# Altium PCB TU_ADV_PCB.PcbDoc
Units mm, origin at the board's own origin, x right, y up, seen from the top; angles counter-clockwise.
Board outline 90.1 x 40 mm, 2 copper layers (Top Layer, Bottom Layer); 28 components, 21 nets, 79 pads, 17 vias.
Unrouted connection lines stored in the file: 14.
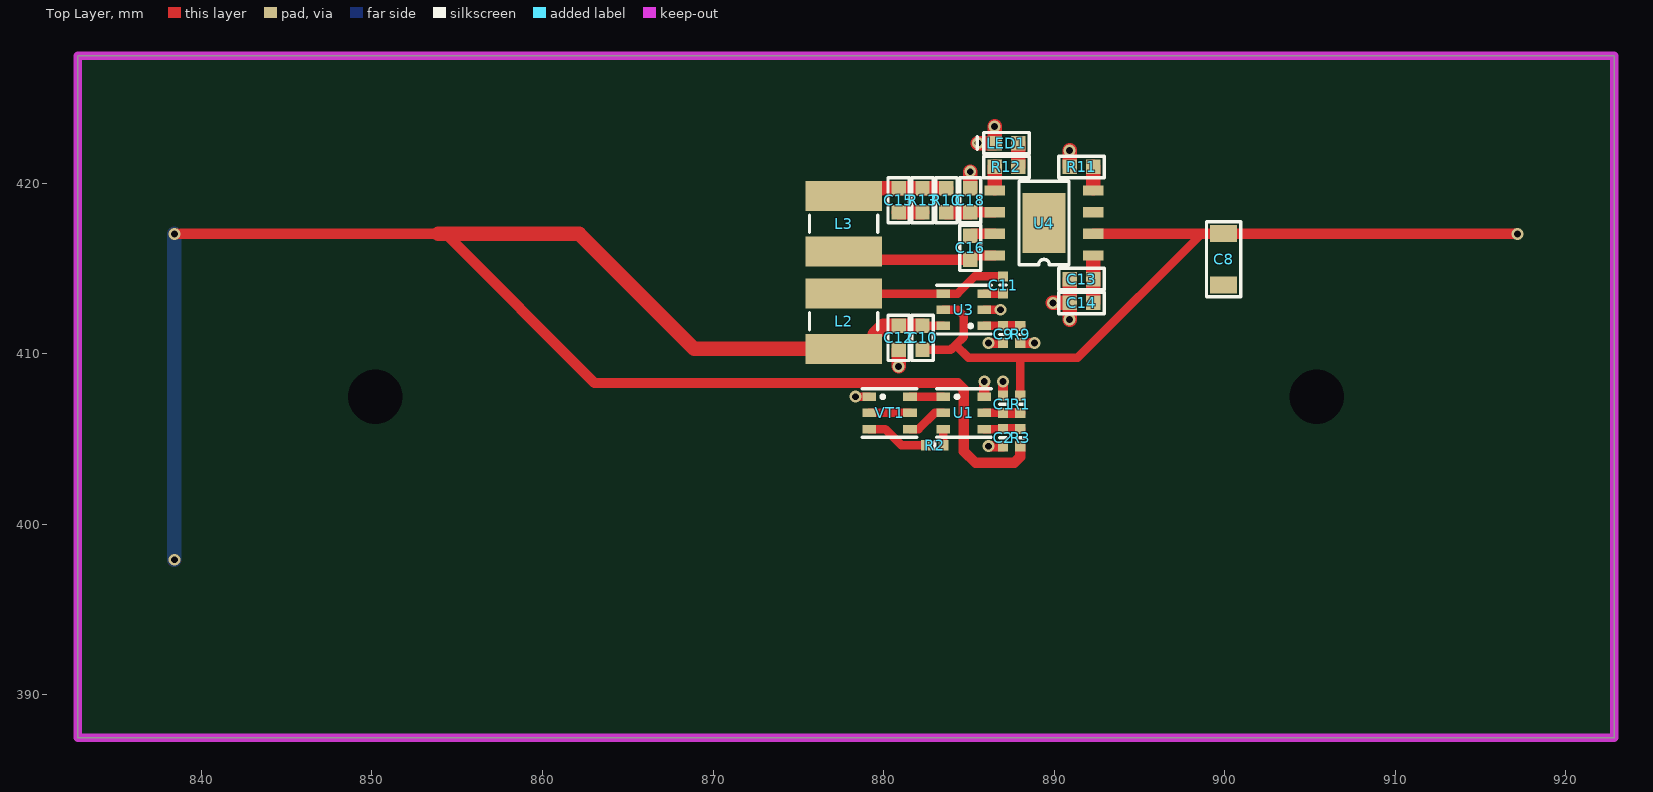
[diagram p0: Top Layer view]
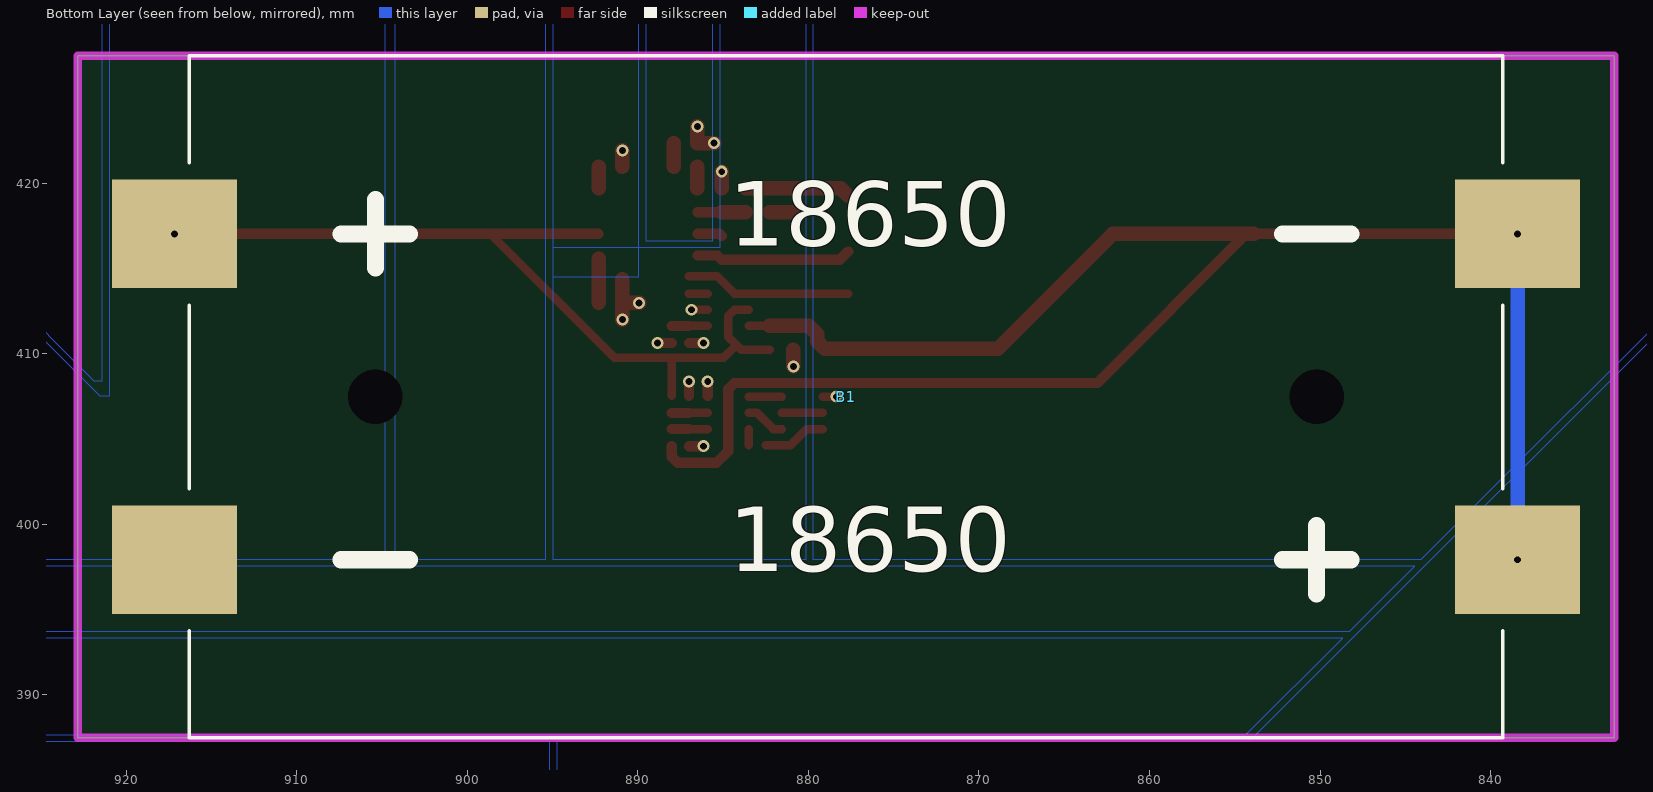
[diagram p1: Bottom Layer view, seen from below]
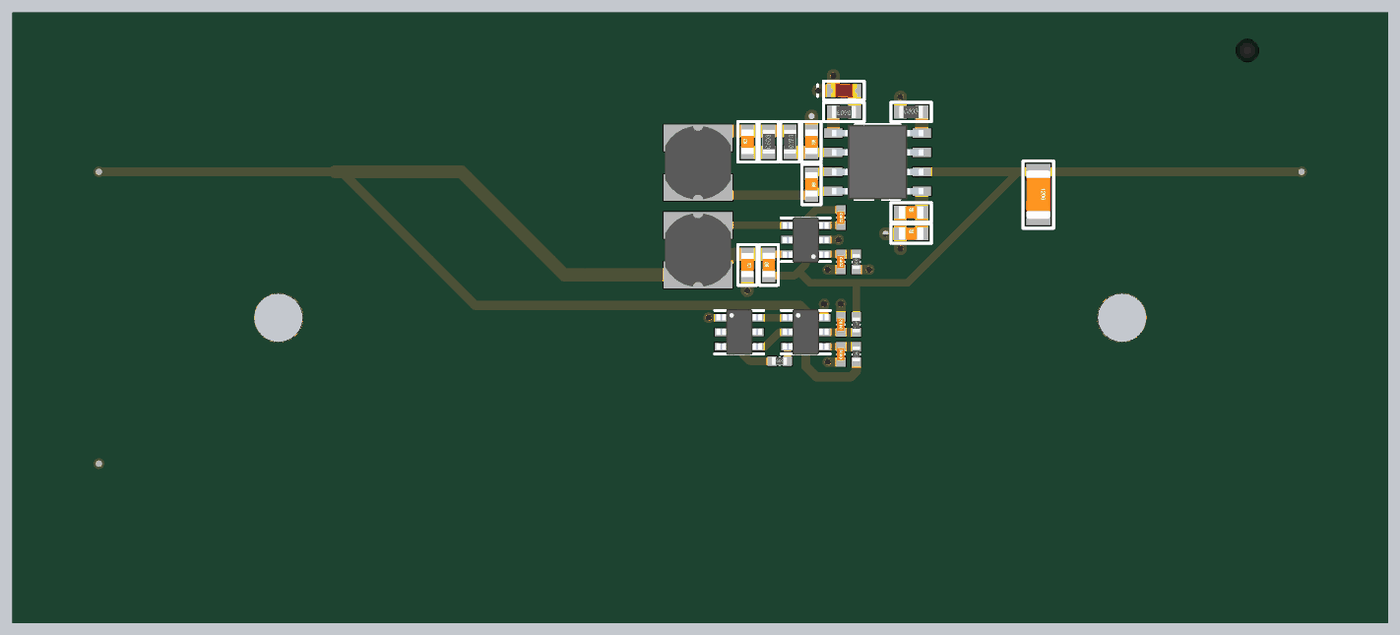
[diagram p2: 3D render of the assembled board from above, using the file's embedded part models]

## Layer stack, top to bottom
Top Solder: solder mask 0.0102, Solder Resist, Dk 3.5
Top Layer: signal copper 0.0356
Dielectric 1: dielectric 0.32, FR-4, Dk 4.8
Bottom Layer: signal copper 0.0356
Bottom Solder: solder mask 0.0102, Solder Resist, Dk 3.5

## Board outline
832.747,387.478 832.747,427.478 922.847,427.478 922.847,387.478

## Design rules (kind name [scope] priority, off if disabled: settings)
BoardOutlineClearance [All] p1: gap=0.3 ignorepadtopadclearanceinfootprint=FALSE
Clearance Clearance_MultiLayerPad [OnLayer('Multi-Layer') and IsPad] p1: gap=0.2 ignorepadtopadclearanceinfootprint=FALSE except(0: Arc-Hole Track-Hole SMDPad-Hole Via-Hole Text-Hole; 0.3: Arc-Poly Arc-Region Track-Poly Track-Region SMDPad-Poly SMDPad-Region Via-Poly Via-Region Fill-Poly Poly-Poly Poly-Region Poly-Text Poly-Hole Region-Region Region-Text Region-Hole; 0.4: Arc-THPad SMDPad-THPad THPad-THPad THPad-Via THPad-Poly THPad-Region THPad-Text THPad-Hole)
Clearance Clearance_Polygon [InPolygon] p2: gap=0.3 ignorepadtopadclearanceinfootprint=FALSE except(0: Arc-Hole Track-Hole SMDPad-Hole Via-Hole Text-Hole; 0.1: Arc-Arc Arc-Track Arc-SMDPad Arc-Via Arc-Text Track-Track Track-SMDPad Track-Via Track-Text SMDPad-SMDPad SMDPad-Via SMDPad-Text Via-Via Via-Text Text-Text; 0.2: Arc-Fill Track-THPad Track-Fill SMDPad-Fill THPad-Fill Via-Fill Fill-Fill Fill-Region Fill-Text Fill-Hole; 0.4: Arc-THPad SMDPad-THPad THPad-THPad THPad-Via THPad-Poly THPad-Region THPad-Text THPad-Hole)
Clearance [All] p3: gap=0.3 ignorepadtopadclearanceinfootprint=FALSE except(0: Arc-Hole Track-Hole SMDPad-Hole Via-Hole Text-Hole; 0.1: Arc-Arc Arc-Track Arc-SMDPad Arc-Via Arc-Text Track-Track Track-SMDPad Track-Via Track-Text SMDPad-SMDPad SMDPad-Via SMDPad-Text Via-Via Via-Text Text-Text; 0.2: Arc-Fill Track-THPad Track-Fill SMDPad-Fill THPad-Fill Via-Fill Fill-Fill Fill-Region Fill-Text Fill-Hole; 0.4: Arc-THPad SMDPad-THPad THPad-THPad THPad-Via THPad-Poly THPad-Region THPad-Text THPad-Hole)
ComponentClearance [All] p1: gap=0.3 collisioncheckmode=3 verticalgap=0.3 showdistances=FALSE
DiffPairsRouting [All] p1: maxlimit=0.3 minlimit=0.1 mostfreqgap=0.15 toplayer_minwidth=0.1 toplayer_maxwidth=0.3 toplayer_prefwidth=0.15 bottomlayer_minwidth=0.1 bottomlayer_maxwidth=0.3 bottomlayer_prefwidth=0.15 maxuncoupledlength=12.7
Height [All] p1: minheight=0 maxheight=50 prefheight=12.7
HoleSize [All] p1: absolutevalues=TRUE maxlimit=10 minlimit=0.3 maxpercent=80.000 minpercent=20.000
HoleToHoleClearance [All] p1: gap=0.3 allowstackedmicrovias=TRUE
MinimumSolderMaskSliver [All] p1: minsoldermaskwidth=0.2
PlaneClearance [All] p1: clearance=0.5
PlaneConnect [All] p1: planeconnectstyle=Relief reliefexpansion=0.5 reliefentries=4 reliefconductorwidth=0.2 reliefairgap=0.2
PolygonConnect PolygonConnect_PadGND [InNet('GND') and IsPad] p1: connectstyle=Relief reliefconductorwidth=0.2 reliefentries=4 polygonreliefangle="90 Angle" airgapwidth=0.2
PolygonConnect PolygonConnect_Via [IsVia] p2: connectstyle=Direct reliefconductorwidth=0.254 reliefentries=4 polygonreliefangle="90 Angle" airgapwidth=0.254
PolygonConnect [All] p3: connectstyle=Relief reliefconductorwidth=0.2 reliefentries=4 polygonreliefangle="90 Angle" airgapwidth=0.2
RoutingVias [All] p1: holewidth=0.2 width=0.4 viastyle="Through Hole" minholewidth=0.2 minwidth=0.4 maxholewidth=0.5 maxwidth=1.2
SilkToSolderMaskClearance [IsPad] p1: minsilkscreentomaskgap=0.2 clearancetoexposedcopper=TRUE
SolderMaskExpansion [All] p1: expansion=0.075 istentingtop=FALSE
Width [All] p1: maxlimit=10 minlimit=0.1 preferedwidth=0.1
21 further rules are at their usual default settings.

## Classes and differential pairs
component class U_2S_BATTERY_PROTECTION_SCH: C1 C2 R1 R2 R3 U1 VT1
component class U_2S_BATTERY_BALANCER_SCH: C8 C9 C10 C11 C12 L2 R9 U3
component class FLASHLIGHT_MAIN_SCH: B1
component class U_2S_BATTERY_CHARGER_SCH: C13 C14 C15 C16 C18 L3 LED1 R10 R11 R12 R13 U4

## Components (designator, comment, footprint, x,y, rotation, side; value= is the part's Value field where it differs from the comment)
B1 "2x18650_holder" 2x18650_holder 877.797,407.478 r180 bottom
C1 "Cap_0402" "CAP: 0402" 887.008,407.033 r90 top value=0.1μF
C2 "Cap_0402" "CAP: 0402" 887.008,405.083 r90 top value=0.1μF
C8 "Cap_1206" "CAP: 1206" 899.938,415.543 r270 top value=22μF
C9 "Cap_0402" "CAP: 0402" 887.008,411.133 r270 top value=1nF
C10 "Cap_0603" "CAP: 0603" 882.283,410.933 r90 top value=10μF
C11 "Cap_0402" "CAP: 0402" 887.008,414.033 r270 top value=10nF
C12 "Cap_0603" "CAP: 0603" 880.883,410.933 r270 top value=10μF
C13 "Cap_0603" "CAP: 0603" 891.608,414.383 r0 top value=22μF
C14 "Cap_0603" "CAP: 0603" 891.608,412.983 r0 top value=22μF
C15 "Cap_0603" "CAP: 0603" 880.883,419.003 r90 top value=10μF
C16 "Cap_0603" "CAP: 0603" 885.083,416.208 r270 top value=0.1μF
C18 "Cap_0603" "CAP: 0603" 885.083,419.003 r270 top value=10μF
L2 "CD43" CD43 877.658,411.908 r180 top value=1μH
L3 "CD43" CD43 877.658,417.628 r0 top value=2.2μH
LED1 "LED_0603" LED_0603 887.208,422.353 r0 top
R1 "" "RES: 0402" 888.008,407.033 r90 top value=330R
R2 "" "RES: 0402" 883.008,404.633 r0 top value=2K
R3 "" "RES: 0402" 888.008,405.083 r270 top value=330R
R9 "" "RES: 0402" 888.008,411.133 r270 top value=200K
R10 "Resistor_0603" "RES: 0603" 883.683,419.003 r270 top value=0.5R
R11 "Resistor_0603" "RES: 0603" 891.608,420.953 r0 top value=51K
R12 "Resistor_0603" "RES: 0603" 887.208,420.953 r180 top value=100R
R13 "Resistor_0603" "RES: 0603" 882.283,419.003 r90 top value=51K
U1 "HY2120" SOT-23-6 884.708,406.533 r0 top
U3 "ETA3000" SOT-23-6 884.708,412.583 r180 top
U4 "IP2325" ESOP-8 889.408,417.668 r180 top
VT1 "8205A" SOT-23-6 880.351,406.533 r0 top

## Footprints (in the part's own frame and the unit in brackets; to place one, negate y for a bottom-side part, rotate by r counter-clockwise, add the part's x,y. Pads: shape width x height; smd on the part's side, far side on the other; paste and mask are expansions set on the pad)
2x18650_holder [mm] "2x18650_holder"
  rect 7.35x6.35 smd: 1(-39.375,9.555) 2(-39.375,-9.555) 3(39.375,-9.555) 4(39.375,9.555)
  rect 0x0 hole 3.2: ""(-27.6,0) ""(27.6,0)
  silkscreen extent -38.5,-20 38.5,20, body extent -43,-19.89 43,19.89, height 14.87
"CAP: 0402" [mm]
  rect 0.6x0.6 smd: 1(-0.5,0) 2(0.5,0)
  silkscreen extent 0,-0.2 0,0.2, body extent -0.53,-0.25 0.51,0.25, height 0.51
"CAP: 0603" [mm]
  rect 0.85x0.85 smd: 1(-0.7,0) 2(0.7,0)
  silkscreen extent -1.33,-0.63 1.33,0.63, body extent -0.8,-0.4 0.8,0.4, height 0.3
"CAP: 1206" [mm]
  rect 1x1.6 smd: 1(-1.5,0) 2(1.5,0)
  silkscreen extent -2.2,-1 2.2,1, body extent -1.6,-0.8 1.6,0.8, height 1
CD43 [mm] "CD43"
  rect 4.5x1.75 smd: 1(0,1.625) 2(0,-1.625)
  silkscreen extent -2,-0.5 2,0.5, body extent -2.15,-2.4 2.15,2.4, height 3.51
ESOP-8 [mm] "ESOP-8"
  rect 1.2x0.6 smd: 1(-2.9,1.905) 2(-2.9,0.635) 3(-2.9,-0.635) 4(-2.9,-1.905) 5(2.9,-1.905) 6(2.9,-0.635) 7(2.9,0.635) 8(2.9,1.905)
  rect 2.5x3.5 smd: 9(0,0)
  silkscreen extent -1.47,-2.45 1.47,2.45, body extent -3,-2.45 3,2.45, height 1.76
LED_0603 [mm] "LED_0603"
  rect 0.85x0.85 smd: 1(-0.7,0) 2(0.7,0)
  silkscreen extent -1.72,-0.63 1.33,0.63, body extent -0.85,-0.45 0.85,0.45, height 0.91
"RES: 0402" [mm]
  rect 0.6x0.6 smd: 1(-0.5,0) 2(0.5,0)
  silkscreen extent 0,-0.2 0,0.2, body extent -0.52,-0.25 0.47,0.25, height 0.34
"RES: 0603" [mm]
  rect 0.85x0.85 smd: 1(-0.7,0) 2(0.7,0)
  silkscreen extent -1.33,-0.63 1.33,0.63, body extent -0.8,-0.4 0.8,0.4, height 0.44
SOT-23-6 [mm]
  rect 0.8x0.5 smd: 1(-1.2,0.95) 2(-1.2,0) 3(-1.2,-0.95) 4(1.2,-0.95) 5(1.2,0) 6(1.2,0.95)
  silkscreen extent -1.6,-1.43 1.6,1.43, body extent -1.5,-1.5 1.5,1.5, height 1.11

## Part data
B1: "18650 battery holder", Datasheet=https://aliexpress.ru/item/32370231319.html?spm=a2g2w.favourites.mywishlist.8.12044aa670bhdZ&sku_id=57294681151, HelpURL=https://aliexpress.ru/item/32370231319.html?spm=a2g2w.favourites.mywishlist.8.12044aa670bhdZ&sku_id=57294681151, Product Category="Battery holders"
C1 C2 C9 C11: Package/Case=0402, Temperature=-55...+125°C(-55...+85°C), TypeDielectric=X7R(X5R), Voltage=??V, Product Category=Capacitors
C8: Package/Case=1206, Temperature=-55...+125°C(-55...+85°C), TypeDielectric=X7R(X5R), Voltage=??V, Product Category=Capacitors
C10 C12 C13 C14 C15 C16 C18: Package/Case=0603, Temperature=-55...+125°C(-55...+85°C), TypeDielectric=X7R(X5R), Voltage=25V, Product Category=Capacitors
L2 L3: "SMD Power Inductor", Manufacturer=SUMIDA, Datasheet=https://products.sumida.com/products/pdf/CD43.pdf, HelpURL=https://aliexpress.ru/item/1005002090028747.html?sku_id=12000018707218161&spm=a2g2w.productlist.search_results.13.550c3fc1XziZsU, Product Category=Inductors
R1 R2 R3 R9: library part Resistor_0402, Package/Case=0402, Temperature=-55...+125°C, Tolerance=±5%, Product Category=Resistors
R10 R11 R12 R13: Package/Case=0603, Temperature=-55...+125°C, Tolerance=±5%, Product Category=Resistors
U1: "2-cell lithium-ion/lithium polymer rechargeable battery / protection", Manufacturer=HYCON, Package/Case=SOT-23-6, Datasheet=https://static.chipdip.ru/lib/671/DOC012671868.pdf, HelpURL=https://aliexpress.ru/item/32858079670.html?sku_id=65323825149&spm=a2g2w.productlist.search_results.5.6e4d5adf5VsdVe, Product Category="Battery protection"
U3: "Inductive cell balancer", Manufacturer=ETA, Package/Case=SOT-23-6, Datasheet=https://datasheetspdf.com/mobile/1424958/ETA/ETA3000/1, HelpURL=https://aliexpress.ru/item/1005002742533593.html?sku_id=12000021935942334, Product Category="Battery balancers"
U4: "2s charge Module", Manufacturer=INJOINIC, Package/Case=ESOP-8, Datasheet=http://www.injoinic.com/wwwroot/uploads/files/20230913/d8e5944686d69fa501fe83e437133f8d.pdf, HelpURL=https://aliexpress.ru/item/1005005892683023.html?sku_id=12000034732384666, Product Category="Charge modules"
VT1: "MOSFET N-CHANNEL 20V 5A", Manufacturer=UMW, Package/Case=SOT-23-6, Datasheet=https://static.chipdip.ru/lib/303/DOC021303523.pdf, HelpURL=https://www.chipdip.by/product/8205a, Product Category=MOSFET
LED1: Product Category="LED Bars and Arrays"

## Via types
v1: diameter 0.7/0.7 (per signal layer), hole 0.4, Top Layer to Bottom Layer, tented both sides, 17 vias

## Nets (pads, with @x,y where several pads share a name; then routed paths per layer and width w, separated by ;. In a path a pad name is that pad's centre, name@x,y a point inside that pad or via, vN(x,y) a via of type N, cw(c..) or ccw(c..) an arc to the next point about the centre after c; other vN are vias at no path point)
+5V: C15.2 L3.1 R10.1 R13.2 | length 6.2
  Top Layer w0.85: L3.1 878.108,419.703 C15.2 R13.2 R10.1
BAT+: B1.1 C8.1 C10.1 R1.2 U3.5 U4.2 | length 50.1
  Top Layer w0.5: C10.1 883.693,410.233 883.942,410.233 884.225,410.517 ; U3.5 884.339,412.583 884.708,412.215 884.708,410.999 884.225,410.517 ; R1.2 888.008,409.764 ; 898.644,417.033 891.375,409.764 888.008,409.764 ; 884.225,410.517 884.978,409.764 888.008,409.764
  Top Layer w0.6: U4.2 898.644,417.033 904.282,417.033 v1(917.172,417.033)
BAT-: R2.1 VT1.3 | length 3.8
  Top Layer w0.5: VT1.3 880.101,405.583 881.051,404.633 R2.1
BATM: B1.3 B1.4 C10.2 C12.1 L2.1 R3.2 U3.6 | length 109.9
  Top Layer w0.5: C10.2 U3.6
  Top Layer w0.6: v1(838.422,417.033) 853.899,417.033 ; 854.318,417.033 863.068,408.283 884.356,408.283 884.708,407.932 884.708,404.291 885.387,403.611 887.656,403.611 888.008,403.963 R3.2
  Top Layer w0.85: 853.899,417.033 854.318,417.033 862.144,417.033 868.894,410.283 L2.1 879.033,410.283 879.483,410.733 879.483,411.135 879.981,411.633 C12.1 C10.2
  Bottom Layer w0.85: v1(838.422,397.923) v1(838.422,417.033)
GND: B1.2 C1.2 C2.1 C8.2 C9.2 C12.2 C13.1 C14.1 C15.1 C18.1 LED1.1 R9.2 R11.1 R13.1 U1.6 U3.2 U4.9 VT1.1 | length 15.6
  Top Layer w0.5: v1(878.351,407.483) VT1.1 ; U3.2 v1(886.858,412.583)
  Top Layer w0.6: U1.6@885.908,407.542 v1(885.908,408.383) ; v1(886.158,404.583) C2.1 ; v1(886.158,410.633) C9.2 ; C1.2 v1(887.008,408.383) ; R9.2 v1(888.858,410.633)
  Top Layer w0.85: v1(880.883,409.258) C12.2 ; C15.1 R13.1 ; C18.1 v1(885.083,420.678) ; v1(885.533,422.353) LED1.1 v1(886.508,423.328) ; v1(889.933,412.983) C14.1 ; v1(890.908,412.008) C14.1 ; C13.1 C14.1 ; R11.1 v1(890.908,421.928)
NetC1_1: C1.1 R1.1 U1.5 | length 2.1
  Top Layer w0.5: U1.5 C1.1
  Top Layer w0.6: C1.1 R1.1
NetC2_2: C2.2 R3.1 U1.4 | length 2.1
  Top Layer w0.5: U1.4 C2.2
  Top Layer w0.6: C2.2 R3.1
NetC9_1: C9.1 R9.1 U3.1 | length 2.1
  Top Layer w0.5: U3.1 C9.1
  Top Layer w0.6: C9.1 R9.1
NetC11_1: C11.1 L2.2 U3.4 | length 9.8
  Top Layer w0.5: L2.2 U3.4 884.339,413.533 885.339,414.533 C11.1
NetC11_2: C11.2 U3.3 | length 1.1
  Top Layer w0.5: U3.3 C11.2
NetC13_2: C13.2 C14.2 U4.1 | length 2.6
  Top Layer w0.85: C14.2 C13.2 U4.1@892.308,415.579
NetC16_1: C16.1 U4.7 | length 1.5
  Top Layer w0.6: C16.1 885.208,417.033 U4.7
NetC16_2: C16.2 L3.2 U4.8 | length 9.2
  Top Layer w0.6: L3.2 878.153,415.508 C16.2 885.338,415.763 U4.8
NetC18_2: C18.2 R10.2 U4.6 | length 2.8
  Top Layer w0.6: C18.2 U4.6
  Top Layer w0.856: R10.2 C18.2
NetLED1_2: LED1.2 R12.1 | length 1.4
  Top Layer w0.85: R12.1 LED1.2
NetR2_2: R2.2 U1.3 | length 0.9
  Top Layer w0.5: R2.2 U1.3
NetR11_2: R11.2 U4.4 | length 1.2
  Top Layer w0.85: U4.4@892.308,419.717 R11.2
NetR12_2: R12.2 U4.5 | length 1.2
  Top Layer w0.85: U4.5@886.508,419.717 R12.2
NetU1_1: U1.1 VT1.6 | length 2
  Top Layer w0.5: VT1.6 U1.1
NetU1_2: U1.2 VT1.4 | length 2.4
  Top Layer w0.5: VT1.4 882.054,405.583 883.004,406.533 U1.2
NetVT1_2: VT1.2 VT1.5 | length 2.4
  Top Layer w0.5: VT1.2 VT1.5
pads on no net: B1. U4.3

## Polygon pours and split planes (outlines as drawn)
no net on Bottom Layer "1" (solid, shelved, pour order 63): 921.403,476.99 921.898,476.99 933.041,465.847 933.041,426.813 941.853,426.813 941.853,422.971 932.641,422.971 932.641,419.169 921.898,408.426 921.403,408.426
no net on Bottom Layer "1" (solid, shelved, pour order 73): 889.944,498.675 930.88,498.675 954.726,474.829 954.726,448.498 960.156,448.498 960.156,443.438 954.726,443.438 949.666,443.438 949.666,472.733 928.784,493.615 895.003,493.615 895.003,414.506 889.943,414.506
no net on Bottom Layer "NONET_L02_P061" (solid, shelved, pour order 61): 941.853,426.813 939.48,426.813 939.48,418.439 941.853,418.439
GND on Bottom Layer "1" (solid, shelved, pour order 30): 949.266,472.567 949.266,443.038 958.703,443.038 958.703,397.94 928.678,397.94 928.678,403.169 942.253,416.744 942.253,427.213 933.441,427.213 933.441,466.012 922.064,477.39 921.003,477.39 921.003,407.5 921.538,407.5 933.041,419.004 933.041,422.571 939.08,422.571 939.08,418.058 925.505,404.483 925.505,397.94 921.006,397.94 916.776,397.94 904.234,397.94 904.236,493.215 928.619,493.215
GND on Bottom Layer "1" (solid, shelved, pour order 81): 807.75,456.593 824.079,472.921 802.195,494.805 802.195,504.135 805.257,504.135 830.275,479.117 855.293,504.135 885.936,504.135 885.936,499.075 879.739,499.075 879.738,397.94 844.052,397.94 808.647,433.344 807.75,433.344
no net on Bottom Layer "1" (solid, shelved, pour order 79): 880.139,498.675 885.199,498.675 885.199,416.218 895.003,416.218 895.003,397.94 880.138,397.94
no net on Bottom Layer "Bottom Layer-E.GND" (solid, shelved, pour order 77): 808.75,431.174 810.251,431.174 823.817,417.608 854.177,387.249 894.756,387.249 894.756,380.262 891.609,380.262 891.609,361.706 852.585,361.706 808.75,405.541
GND on Bottom Layer "1" (solid, shelved, pour order 67): 885.599,504.135 933.142,504.135 960.186,477.091 960.186,455.774 955.126,455.774 955.126,474.994 931.046,499.075 889.543,499.075 889.543,416.618 885.599,416.618
GND on Bottom Layer "1" (solid, shelved, pour order 65): 895.403,493.215 904.856,493.215 904.856,397.94 895.403,397.94
no net on Bottom Layer "1" (solid, shelved, pour order 69): 930.486,397.54 930.486,393.726 848.265,393.726 844.452,397.54
GND on Bottom Layer "1" (solid, shelved, pour order 71): 848.665,393.326 930.886,393.326 930.886,398.29 958.703,398.29 958.703,387.648 854.343,387.648
no net on Bottom Layer "Bottom Layer-E.GND" (solid, shelved, pour order 75): 895.156,387.249 932.289,387.249 932.289,361.706 892.009,361.706 892.009,379.862 895.156,379.862
no net on Top Layer "Top Layer-+3V3" (solid, shelved, pour order 103): 955.861,402.525 960.181,402.525 960.181,390.039 962.181,392.039 962.181,410.689 942.581,410.689 942.581,407 955.862,407

## Keep-outs
Keep-Out Layer:
  the board outline again, w0.5

## Silkscreen, mask and mechanical layers (free items; w line width, h text height)
Mechanical 3:
  lines w0.05: 883.508,406.533 885.908,406.533 ; 884.852,408.383 887.008,408.383 ; 885.908,407.483 885.908,408.684
Mechanical 15:
  lines w0.05: 874.37,410.491 882.74,410.491 ; 877.658,394.458 877.658,416.003 ; 879.908,420.128 880.458,420.128 ; 880.458,418.728 880.458,419.278

## Text inside footprints (layer, text, board x,y; h text height)
B1: Bottom Overlay "18650" at 884.687,415.084 h6.5; Bottom Overlay "18650" at 884.687,395.974 h6.5